# EAGLE board sesame-03 (EAGLE 6.5.0)

Size 100 x 80 mm. Coordinates in mm from the lower left corner, seen from the top.
Outline: 0,0 100,0 100,80 0,80 0,0
Copper layers (1*16): Top 0.035mm / dielectric 1.5mm / Bottom 0.035mm
Design rules "default": minimum track width 10mil, minimum drill 24mil, track to track 8mil, track to pad 8mil, pad to pad 8mil, via to via 8mil, smd to smd 8mil, copper to edge 40mil, drill to drill 8mil, minimum pad ring 10mil, minimum via ring 8mil, stop-mask expansion 4mil, vias tented up to drill 0mil, thermal gap 10mil
Net classes: 1 HI POWER: width 1.016 mm; 2 POWER: width 0.61 mm

## Footprints (pad centres in the part's own frame; a part is rotated, then mirrored left to right if it is on the bottom)
C025-030X050 = drill 0.813 octagon: 1 -1.27,0; 2 1.27,0
DO35-7 = drill 0.813 long: A 3.81,0; C -3.81,0
DO41-10 = drill 1.118: A 5.08,0; C -5.08,0
3,3 = hole 3.3: 0,0
DIL28-3 = drill 0.813 long: 1 -16.51,-3.81; 2 -13.97,-3.81; 3 -11.43,-3.81; 4 -8.89,-3.81; 5 -6.35,-3.81; 6 -3.81,-3.81; 7 -1.27,-3.81; 8 1.27,-3.81; 9 3.81,-3.81; 10 6.35,-3.81; 11 8.89,-3.81; 12 11.43,-3.81; 13 13.97,-3.81; 14 16.51,-3.81; 15 16.51,3.81; 16 13.97,3.81; 17 11.43,3.81; 18 8.89,3.81; 19 6.35,3.81; 20 3.81,3.81; 21 1.27,3.81; 22 -1.27,3.81; 23 -3.81,3.81; 24 -6.35,3.81; 25 -8.89,3.81; 26 -11.43,3.81; 27 -13.97,3.81; 28 -16.51,3.81
78LXX = drill 0.813 octagon: GND 0,1.905; IN 1.27,0; OUT -1.27,0
SOT223 = smd 1.5 x 2: 1 -2.3,-3.15; 2 0,-3.15; 3 2.3,-3.15 | smd 3.8 x 2: 4 0,3.15
1X07 = drill 1.016 long: 1 -7.62,0; 2 -5.08,0; 3 -2.54,0; 4 0,0; 5 2.54,0; 6 5.08,0; 7 7.62,0
TQ2 = drill 1: 1 -5.08,-3.81; 2 -2.54,-3.81; 3 0,-3.81; 4 2.54,-3.81; 5 5.08,-3.81; 6 5.08,3.81; 7 2.54,3.81; 8 0,3.81; 9 -2.54,3.81; 10 -5.08,3.81
LED3MM = drill 0.813 octagon: A -1.27,0; K 1.27,0
LED5MM = drill 0.813 octagon: A -1.27,0; K 1.27,0
LSP13 = drill 1.321 pad 2.159 octagon: MP 0,0
1751248 = drill 1.1 pad 1.7: 1 -1.75,-0.1; 2 1.75,-0.1
0204/7 = drill 0.813 octagon: 1 -3.81,0; 2 3.81,0
TO18 = drill 0.813 octagon: 1 -1.27,-1.27; 2 1.27,-1.27; 3 1.27,1.27
BLUETOOTH_MODULE = smd 1.016 x 0.508: P$1 -7.5,7.5; P$2 -7.5,6; P$3 -7.5,4.5; P$4 -7.5,3; P$5 -7.5,1.5; P$6 -7.5,0; P$7 -7.5,-1.5; P$8 -7.5,-3; P$9 -7.5,-4.5; P$10 -7.5,-6; P$11 -7.5,-7.5; P$12 -7.5,-9; P$13 -7.5,-10.5; P$22 6.23,-10.5; P$23 6.23,-9; P$24 6.23,-7.5; P$25 6.23,-6; P$26 6.23,-4.5; P$27 6.23,-3; P$28 6.23,-1.5; P$29 6.23,0; P$30 6.23,1.5; P$31 6.23,3; P$32 6.23,4.5; P$33 6.23,6; P$34 6.23,7.5 | smd 0.508 x 1.016: P$14 -6,-12; P$15 -4.5,-12; P$16 -3,-12; P$17 -1.5,-12; P$18 0,-12; P$19 1.5,-12; P$20 3,-12; P$21 4.5,-12

## Placement (x,y rotation side)
C1  100nF  [C025-030X050]  24.13,20.32 0 top
D1  1N4148DO35-7  [DO35-7]  44.45,2.54 0 top
D2  1N4004  [DO41-10]  44.45,6.35 0 top
D3  1N4004  [DO41-10]  30.48,2.54 0 top
H1  MOUNT-HOLE3.3  [3,3]  -17.78,55.88 0 top  (outside the outline)
H2  MOUNT-HOLE3.3  [3,3]  -26.67,55.88 0 top  (outside the outline)
IC1  MEGA8-P  [DIL28-3]  24.13,27.94 0 top
IC3  78LS05  [78LXX]  16.51,17.78 0 top
IC4  LD117AS33TR  [SOT223]  7.62,55.88 0 bottom
JP1  [1X07]  27.94,38.1 180 top
K1  TQ2-5V  [TQ2]  31.75,11.43 270 top
LED1  [LED3MM]  7.62,66.04 0 top
LED2  RD  [LED5MM]  53.34,25.4 0 top
LED3  GR  [LED5MM]  54.61,15.24 0 top
LSP1  LSP13  [LSP13]  2.54,26.67 0 top
LSP2  LSP13  [LSP13]  2.54,20.32 0 top
LSP3  LSP13  [LSP13]  -45.72,-15.24 0 top  (outside the outline)
LSP4  LSP13  [LSP13]  -45.72,-20.32 0 top  (outside the outline)
LSP5  LSP13  [LSP13]  -45.72,-25.4 0 top  (outside the outline)
LSP6  LSP13  [LSP13]  -45.72,-30.48 0 top  (outside the outline)
MAGNET  [1751248]  -41.91,44.45 0 top  (outside the outline)
POWER  [1751248]  3.81,3.81 0 top
R1  3K3  [0204/7]  39.37,64.77 0 top
R2  330R  [0204/7]  46.99,26.67 270 top
R3  330R  [0204/7]  54.61,10.16 0 top
R4  330R  [0204/7]  5.08,72.39 0 top
R5  1K  [0204/7]  46.99,15.24 90 top
R6  10K  [0204/7]  2.54,64.77 90 top
T1  2N2222  [TO18]  43.18,15.24 0 top
U$1  HR5  [BLUETOOTH_MODULE]  20.32,68.58 0 bottom
WIELAND  [1751248]  -31.75,44.45 0 top  (outside the outline)

## Library data of the parts
C1 R1-R6 = rcl
D1-D3 = diode
H1 H2 = holes
IC1 = atmel; OC_FARNELL: unknown; OC_NEWARK: unknown
IC3 IC4 = v-reg
JP1 = pinhead
K1 = relay; MF: AROMAT/ MATSUSHITA; MPN: TQ2-5V; OC_FARNELL: 1175716; OC_NEWARK: 64K3200
LED1-LED3 = led
LSP1-LSP6 = solpad
MAGNET POWER WIELAND = con-phoenix-350; OC_FARNELL: unknown; OC_NEWARK: unknown
T1 = transistor
U$1 = mikee

## Nets
12V [HI POWER]: IC3.IN IC4.3 K1.3 POWER.1
+3V3 [POWER]: IC4.4 R1.1 U$1.P$12
+5V [POWER]: C1.2 D2.C IC1.7 IC3.OUT JP1.7 K1.1
/RESET: IC1.1 JP1.4 LSP2.MP
AVCC: IC1.20
GND: C1.1 D3.A IC1.8 IC1.22 IC3.GND IC4.1 JP1.5 LED2.K LED3.K LSP1.MP MAGNET.2 POWER.2 R4.1 R6.1 T1.1 U$1.P$13 U$1.P$22
N$1: IC1.2 U$1.P$1
N$2: IC1.28 R5.2
N$3: IC1.26 R2.2
N$4: LED3.A R2.1
N$5: D1.C IC1.3
N$6: IC1.23 R3.2
N$7: IC1.19 JP1.3
N$8: IC1.18 JP1.2
N$9: IC1.17 JP1.1
N$10 [HI POWER]: D3.C K1.4 MAGNET.1
N$11: LED1.A U$1.P$24
N$12: D1.A R1.2 U$1.P$2
N$13: R5.1 R6.2 T1.2
N$14: IC1.4 WIELAND.1
N$15: IC1.5 WIELAND.2
N$16: LED2.A R3.1
N$22: LED1.K R4.2
N$23: D2.A K1.10 T1.3

## Tracks (layer width: path | path; a pad name or v marks a point on that pad's centre or on a via)
12V  (3 unrouted)
+3V3  (2 unrouted)
+5V  (5 unrouted)
/RESET  (2 unrouted)
GND  (16 unrouted)
N$1  (1 unrouted)
N$2  (1 unrouted)
N$3  (1 unrouted)
N$4  (1 unrouted)
N$5  (1 unrouted)
N$6  (1 unrouted)
N$7  (1 unrouted)
N$8  (1 unrouted)
N$9  (1 unrouted)
N$10  (2 unrouted)
N$11  (1 unrouted)
N$12  (2 unrouted)
N$13  (2 unrouted)
N$14  (1 unrouted)
N$15  (1 unrouted)
N$16  (1 unrouted)
N$22  (1 unrouted)
N$23  (2 unrouted)